# Altium PCB PCB_V1.PcbDoc
Units mm, origin at the board's own origin, x right, y up, seen from the top; angles counter-clockwise.
Board outline 168.23 x 26 mm, 2 copper layers (Top Layer, Bottom Layer), stack 0.08 mm thick; 7 components, 4 nets, 16 pads, 0 vias.
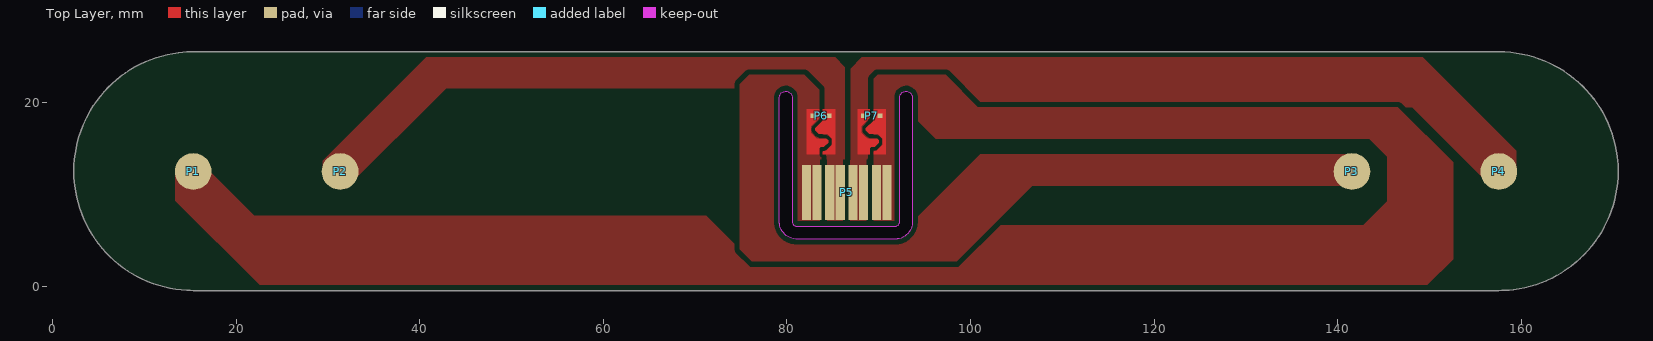
[diagram p0: Top Layer view]
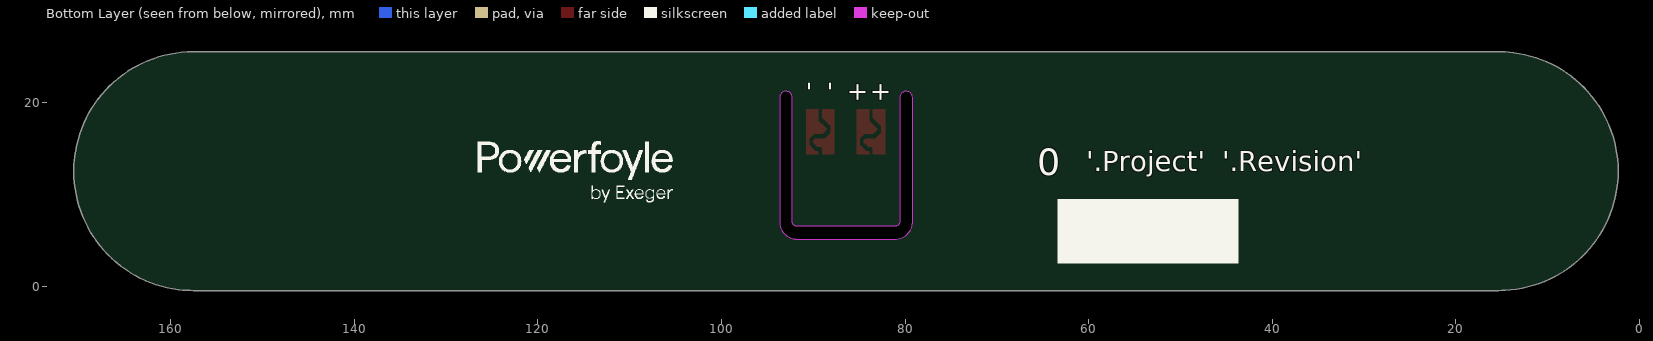
[diagram p1: Bottom Layer view, seen from below]

## Layer stack, top to bottom
Top Solder: solder mask 0.0102, Solder Resist, Dk 3.5
Top Layer: signal copper 0.035
Dielectric 1: dielectric 0.01, Kapton, Dk 4.8
Bottom Layer: signal copper 0.035
Bottom Solder: solder mask 0.0102, Solder Resist, Dk 3.5

## Board outline
2.424,10.944 cw(c15.403,12.527) 2.345,11.85 cw(c15.539,12.534) 2.327,12.535 cw(c15.541,12.535) 2.344,13.199 cw(c15.33,12.533) 13.737,25.439 cw(c15.319,12.459) 14.642,25.517 cw(c15.327,12.323) 15.327,25.535 157.557,25.535 cw(c157.558,12.321) 158.221,25.518 cw(c157.556,12.532) 170.461,14.126 cw(c157.482,12.543) 170.539,13.22 cw(c157.345,12.536) 170.557,12.535 cw(c157.343,12.534) 170.541,11.871 cw(c157.554,12.537) 159.148,-0.369 cw(c157.565,12.611) 158.242,-0.447 cw(c157.558,12.747) 157.557,-0.465 15.327,-0.465 cw(c15.327,12.749) 14.664,-0.448 cw(c15.329,12.538)
cut-out: 79.199,6.802 cw(c81.096,7.034) 79.188,6.935 79.187,6.935 cw(c81.116,7.035) 79.185,7.035 79.185,20.535 cw(c79.896,20.535) 79.186,20.571 cw(c79.885,20.535) 79.799,21.23 cw(c79.884,20.531) 79.848,21.234 cw(c79.885,20.523) 79.885,21.235 cw(c79.885,20.523) 79.921,21.234 cw(c79.885,20.535) 80.58,20.621 cw(c79.881,20.535) 80.584,20.572 cw(c79.873,20.535) 80.585,20.535 80.585,7.035 ccw(c81.093,7.035) 80.586,7.009 ccw(c81.088,7.035) 80.589,6.974 ccw(c81.085,7.035) 81.059,6.536 ccw(c81.085,7.043) 81.085,6.535 91.785,6.535 ccw(c91.785,7.043) 91.811,6.536 ccw(c91.785,7.038) 91.846,6.539 ccw(c91.785,7.035) 92.284,7.009 ccw(c91.777,7.035) 92.285,7.035 92.285,20.535 cw(c92.996,20.535) 92.286,20.571 cw(c92.985,20.535) 92.899,21.23 cw(c92.984,20.531) 92.948,21.234 cw(c92.985,20.523) 92.985,21.235 cw(c92.985,20.523) 93.021,21.234 cw(c92.985,20.535) 93.68,20.621 cw(c92.981,20.535) 93.684,20.572 cw(c92.973,20.535) 93.685,20.535 93.685,7.035 cw(c91.754,7.035) 93.682,6.938 cw(c91.784,7.035) 92.017,5.149 cw(c91.786,7.046) 91.885,5.138 cw(c91.785,7.066) 91.785,5.135 81.085,5.135 cw(c81.085,7.066) 80.988,5.137 cw(c81.085,7.035)

## Design rules (kind name [scope] priority, off if disabled: settings)
BoardOutlineClearance [All] p1: gap=0.6 ignorepadtopadclearanceinfootprint=FALSE
Clearance "Clearance to footprint" [HasFootprint('Customer_2022_solder_short_ISOL_0.4_S') OR HasFootprint('Customer_2026_solder_short_ISOL_0.4') OR HasFootprint('EXEGER_IV_8_PIN_ISOL_0.4')] p1: gap=0.4 ignorepadtopadclearanceinfootprint=FALSE
Clearance "Clearance to cell connections" [HasFootprint('Cell_pad_4mm_SM0.5mm')] p2: gap=0.6 ignorepadtopadclearanceinfootprint=FALSE
Clearance [All] p3: gap=0.6 ignorepadtopadclearanceinfootprint=FALSE
DiffPairsRouting [All] p1: maxlimit=0.254 minlimit=0.254 mostfreqgap=0.254 substack1={AC398A8C-2EBD-4929-A576-1C4F7B57599D} toplayer_{ac398a8c-2ebd-4929-a576-1c4f7b57599d}_minwidth=0.381 toplayer_{ac398a8c-2ebd-4929-a576-1c4f7b57599d}_maxwidth=0.381 toplayer_{ac398a8c-2ebd-4929-a576-1c4f7b57599d}_prefwidth=0.381 bottomlayer_{ac398a8c-2ebd-4929-a576-1c4f7b57599d}_minwidth=0.381 bottomlayer_{ac398a8c-2ebd-4929-a576-1c4f7b57599d}_maxwidth=0.381 bottomlayer_{ac398a8c-2ebd-4929-a576-1c4f7b57599d}_prefwidth=0.381 substack2={C3FBE846-BD83-49AA-845B-1BEE8A776ADA} toplayer_{c3fbe846-bd83-49aa-845b-1bee8a776ada}_minwidth=0.381 toplayer_{c3fbe846-bd83-49aa-845b-1bee8a776ada}_maxwidth=0.381 toplayer_{c3fbe846-bd83-49aa-845b-1bee8a776ada}_prefwidth=0.381 bottomlayer_{c3fbe846-bd83-49aa-845b-1bee8a776ada}_minwidth=0.381 bottomlayer_{c3fbe846-bd83-49aa-845b-1bee8a776ada}_maxwidth=0.381 bottomlayer_{c3fbe846-bd83-49aa-845b-1bee8a776ada}_prefwidth=0.381 substack3={068A34C2-B61F-40AE-8550-B44704E20CBD} toplayer_{068a34c2-b61f-40ae-8550-b44704e20cbd}_minwidth=0.381 toplayer_{068a34c2-b61f-40ae-8550-b44704e20cbd}_maxwidth=0.381 toplayer_{068a34c2-b61f-40ae-8550-b44704e20cbd}_prefwidth=0.381 bottomlayer_{068a34c2-b61f-40ae-8550-b44704e20cbd}_minwidth=0.381 bottomlayer_{068a34c2-b61f-40ae-8550-b44704e20cbd}_maxwidth=0.381 bottomlayer_{068a34c2-b61f-40ae-8550-b44704e20cbd}_prefwidth=0.381 toplayer_minwidth=0.381 toplayer_maxwidth=0.381 toplayer_prefwidth=0.381 bottomlayer_minwidth=0.381 bottomlayer_maxwidth=0.381 bottomlayer_prefwidth=0.381 substack4={1DBF04A3-A739-4845-80F4-67AE6DF34821} toplayer_{1dbf04a3-a739-4845-80f4-67ae6df34821}_minwidth=0.381 toplayer_{1dbf04a3-a739-4845-80f4-67ae6df34821}_maxwidth=0.381 toplayer_{1dbf04a3-a739-4845-80f4-67ae6df34821}_prefwidth=0.381 bottomlayer_{1dbf04a3-a739-4845-80f4-67ae6df34821}_minwidth=0.381 bottomlayer_{1dbf04a3-a739-4845-80f4-67ae6df34821}_maxwidth=0.381 bottomlayer_{1dbf04a3-a739-4845-80f4-67ae6df34821}_prefwidth=0.381 substack5={706D0DFD-092C-4A59-9570-597311E816E1} toplayer_{706d0dfd-092c-4a59-9570-597311e816e1}_minwidth=0.381 toplayer_{706d0dfd-092c-4a59-9570-597311e816e1}_maxwidth=0.381 toplayer_{706d0dfd-092c-4a59-9570-597311e816e1}_prefwidth=0.381 bottomlayer_{706d0dfd-092c-4a59-9570-597311e816e1}_minwidth=0.381 bottomlayer_{706d0dfd-092c-4a59-9570-597311e816e1}_maxwidth=0.381 bottomlayer_{706d0dfd-092c-4a59-9570-597311e816e1}_prefwidth=0.381 substack6={F6441547-04AD-42D8-8F2E-114EB13474D3} toplayer_{f6441547-04ad-42d8-8f2e-114eb13474d3}_minwidth=0.381 toplayer_{f6441547-04ad-42d8-8f2e-114eb13474d3}_maxwidth=0.381 toplayer_{f6441547-04ad-42d8-8f2e-114eb13474d3}_prefwidth=0.381 bottomlayer_{f6441547-04ad-42d8-8f2e-114eb13474d3}_minwidth=0.381 bottomlayer_{f6441547-04ad-42d8-8f2e-114eb13474d3}_maxwidth=0.381 bottomlayer_{f6441547-04ad-42d8-8f2e-114eb13474d3}_prefwidth=0.381 substack7={D3D7B19F-2A18-4F5B-8A84-D7E783B0B577} toplayer_{d3d7b19f-2a18-4f5b-8a84-d7e783b0b577}_minwidth=0.381 toplayer_{d3d7b19f-2a18-4f5b-8a84-d7e783b0b577}_maxwidth=0.381 toplayer_{d3d7b19f-2a18-4f5b-8a84-d7e783b0b577}_prefwidth=0.381 bottomlayer_{d3d7b19f-2a18-4f5b-8a84-d7e783b0b577}_minwidth=0.381 bottomlayer_{d3d7b19f-2a18-4f5b-8a84-d7e783b0b577}_maxwidth=0.381 bottomlayer_{d3d7b19f-2a18-4f5b-8a84-d7e783b0b577}_prefwidth=0.381 substack8={33F0C8AE-5BAA-4F54-8420-C15B5188DF2B} toplayer_{33f0c8ae-5baa-4f54-8420-c15b5188df2b}_minwidth=0.381 toplayer_{33f0c8ae-5baa-4f54-8420-c15b5188df2b}_maxwidth=0.381 toplayer_{33f0c8ae-5baa-4f54-8420-c15b5188df2b}_prefwidth=0.381 bottomlayer_{33f0c8ae-5baa-4f54-8420-c15b5188df2b}_minwidth=0.381 bottomlayer_{33f0c8ae-5baa-4f54-8420-c15b5188df2b}_maxwidth=0.381 bottomlayer_{33f0c8ae-5baa-4f54-8420-c15b5188df2b}_prefwidth=0.381 substack9={5DEA7FFC-9C65-4E3C-AA6C-196D072506BA} toplayer_{5dea7ffc-9c65-4e3c-aa6c-196d072506ba}_minwidth=0.381 toplayer_{5dea7ffc-9c65-4e3c-aa6c-196d072506ba}_maxwidth=0.381 toplayer_{5dea7ffc-9c65-4e3c-aa6c-196d072506ba}_prefwidth=0.381 bottomlayer_{5dea7ffc-9c65-4e3c-aa6c-196d072506ba}_minwidth=0.381 bottomlayer_{5dea7ffc-9c65-4e3c-aa6c-196d072506ba}_maxwidth=0.381 bottomlayer_{5dea7ffc-9c65-4e3c-aa6c-196d072506ba}_prefwidth=0.381 maxuncoupledlength=12.7
PolygonConnect [All] p1: connectstyle=Direct reliefconductorwidth=0.254 reliefentries=4 polygonreliefangle="90 Angle" airgapwidth=0.254
RoutingVias [All] p1: holewidth=0.5 width=1 viastyle="Through Hole" minholewidth=0.5 minwidth=1 maxholewidth=0.5 maxwidth=1
SolderMaskExpansion [All] p1: expansion=0.102 istentingtop=FALSE
UnRoutedNet [All] p1: checkbadconnections=TRUE
Width [All] p1: maxlimit=10 minlimit=0.2 preferedwidth=2 substack1={AC398A8C-2EBD-4929-A576-1C4F7B57599D} substack2={C3FBE846-BD83-49AA-845B-1BEE8A776ADA} substack3={068A34C2-B61F-40AE-8550-B44704E20CBD} substack4={1DBF04A3-A739-4845-80F4-67AE6DF34821} substack5={706D0DFD-092C-4A59-9570-597311E816E1} substack6={F6441547-04AD-42D8-8F2E-114EB13474D3} substack7={D3D7B19F-2A18-4F5B-8A84-D7E783B0B577} substack8={33F0C8AE-5BAA-4F54-8420-C15B5188DF2B} substack9={5DEA7FFC-9C65-4E3C-AA6C-196D072506BA}
28 further rules are at their usual default settings.

## Components (designator, comment, footprint, x,y, rotation, side; value= is the part's Value field where it differs from the comment)
P1 "Cell connection" Cell_pad_4mm_SM0.5mm 15.331,12.5 r0 top
P2 "Cell connection" Cell_pad_4mm_SM0.5mm 31.331,12.5 r0 top
P3 "Cell connection" Cell_pad_4mm_SM0.5mm 141.561,12.5 r0 top
P4 "Cell connection" Cell_pad_4mm_SM0.5mm 157.561,12.5 r0 top
P5 "Exeger IV-test" EXEGER_IV_8_PIN_NO_STIFF_ISOL_0.4 82.069,10.231 r90 top
P6 "Customer conn, solder short" Customer_2022_solder_short_ISOL_0.4_S 83.911,17.294 r270 top
P7 "Customer conn, solder short" Customer_2022_solder_short_ISOL_0.4_S 89.423,17.294 r270 top

## Footprints (in the part's own frame and the unit in brackets; to place one, negate y for a bottom-side part, rotate by r counter-clockwise, add the part's x,y. Pads: shape width x height; smd on the part's side, far side on the other; paste and mask are expansions set on the pad)
Cell_pad_4mm_SM0.5mm [mm]
  round 4 smd mask+0: 1(0,0)
Customer_2022_solder_short_ISOL_0.4_S [mm]
  rect 0.5x0.5 smd paste-2 mask+0: 1(-1.3,0.725) 2(-1.3,-1.1)
  Top Layer region: 0.7,0.488 1.237,1.025 1.875,1.025 2.6,0.3 2.6,0.075 2.65,0.025 2.9,0.025 2.9,1.375 0.7,1.375 -2,1.375 -2,0.4 -1.912,0.488
  Top Layer region: -2,-1.725 2.125,-1.725 2.125,0.125 1.675,0.575 1.4,0.575 1.225,0.4 1.225,-0.65 0.575,-1.3 -0.125,-1.3 -1.05,-0.375 -2,-0.375
  Top Layer region: 1.875,0 2.25,-0.375 2.9,-0.375 2.9,-1.721 2.125,-1.725 1.138,-0.737
  Top Layer region: -2,1.375 0.7,1.375 0.7,-0.45 0.325,-0.825 0.1,-0.825 -0.75,0.025 -2,0.025
EXEGER_IV_8_PIN_NO_STIFF_ISOL_0.4 [mm] "TE  4-487576-9 mating"
  rect 6x1 smd paste-2 mask+0.1: 1(0,-0.066) 2(0,-1.204) 3(0,-2.606) 4(0,-3.744) 5(0,-5.146) 6(0,-6.284) 7(0,-7.686) 8(0,-8.824)

## Part data
P1 P2 P3 P4: library part "Cell connection 1P"
P5: library part "Header 8", "Header, 8-Pin"
P6 P7: library part "Header 2", "Header, 2-Pin"

## Nets (pads, with @x,y where several pads share a name; then routed paths per layer and width w, separated by ;. In a path a pad name is that pad's centre, name@x,y a point inside that pad or via, vN(x,y) a via of type N, cw(c..) or ccw(c..) an arc to the next point about the centre after c; other vN are vias at no path point)
N_1: P1.1 P5.7 P5.8 P7.1
N_2: P4.1 P5.5 P5.6 P7.2
P_1: P2.1 P5.3 P5.4 P6.1
P_2: P3.1 P5.1 P5.2 P6.2

## Polygon pours and split planes (outlines as drawn)
P_1 on Top Layer "NONET_L-01_P-001" (solid, pour order 1): 29.44,12.5 29.44,13.648 42.592,26.8 83.4,26.8 86.33,23.87 86.33,6.744 86.149,6.562 84.395,6.562 84.211,6.746 84.211,14.119 83.936,14.394 83.936,20.987 83.344,21.579 42.874,21.579 31.895,10.6 31.021,10.6
N_2 on Top Layer "NONET_L-01_P-001" (solid, pour order 3): 159.454,12.498 159.454,14.746 147.4,26.8 90.038,26.8 86.435,23.197 86.435,6.535 88.849,6.535 88.86,6.546 88.86,14.206 89.047,14.394 89.047,22.2 90.048,23.2 97.118,23.2 100.818,19.5 148.133,19.5 156.362,11.27
N_1 on Top Layer "NONET_L-01_P-001" (solid, pour order 2): 13.39,12.676 13.39,9.31 24.4,-1.7 147.9,-1.7 152.567,2.967 152.567,13.481 146.548,19.5 100.818,19.5 97.285,23.033 89.88,23.033 89.448,22.6 89.448,13.421 89.235,13.208 89.235,6.535 93.185,6.535 93.685,7.035 93.685,18.594 96.21,16.069 143.457,16.069 145.4,14.126 145.4,9.265 142.8,6.665 102.446,6.665 98.281,2.5 76.4,2.5 71.2,7.7 21.964,7.7 15.316,14.347
P_2 on Top Layer "NONET_L-01_P-001" (solid, pour order 0): 141.546,14.4 101.05,14.4 93.185,6.535 83.724,6.535 83.724,14.206 83.536,14.394 83.536,21.387 81.891,23.033 75.899,23.033 74.867,22 74.867,4.033 76.2,2.7 98.481,2.7 106.725,10.944 142.744,10.944 142.8,11

## Silkscreen, mask and mechanical layers (free items; w line width, h text height)
Bottom Overlay:
  drawing of 21 lines, arcs and shapes, not listed
  text "+" at 83.505,22.255 h2 r90
  text "+" at 86.055,22.255 h2 r90
  text "-" at 88.905,22.255 h2 r90
  text "-" at 91.23,22.255 h2 r90
  text "'.Project'  '.Revision'" at 60.25,12.5 h2.2
  text "0" at 65.6,11.1 h5
Cell drawing:
  drawing of 184 lines, arcs and shapes, not listed
Mech notes:
  rectangle: 203.1,7.25 230.1,17.75
Board Outline:
  the board outline again, w0.013
Cutouts:
  circle w0.1: c141.561,12.5 r1
  circle w0.1: c157.561,12.5 r1
  circle w0.1: c31.331,12.5 r1
  circle w0.1: c15.331,12.5 r1
  lines w0.013: 79.186,20.571 cw(c79.885,20.535) 79.799,21.23 cw(c79.884,20.531) 79.848,21.234 cw(c79.885,20.523) 79.885,21.235 cw(c79.885,20.523) 79.921,21.234 cw(c79.885,20.535) 80.58,20.621 cw(c79.881,20.535) 80.584,20.572 cw(c79.873,20.535) 80.585,20.535 80.585,7.035 ccw(c81.093,7.035) 80.586,7.009 ccw(c81.088,7.035) 80.589,6.974 ccw(c81.085,7.035) 81.059,6.536 ccw(c81.085,7.043) 81.085,6.535 91.785,6.535 ccw(c91.785,7.043) 91.811,6.536 ccw(c91.785,7.038) 91.846,6.539 ccw(c91.785,7.035) 92.284,7.009 ccw(c91.777,7.035) 92.285,7.035 92.285,20.535 cw(c92.996,20.535) 92.286,20.571 cw(c92.985,20.535) 92.899,21.23 cw(c92.984,20.531) 92.948,21.234 cw(c92.985,20.523) 92.985,21.235 cw(c92.985,20.523) 93.021,21.234 cw(c92.985,20.535) 93.68,20.621